# Altium PCB m2m V200.PcbDoc
Units mm, origin at the board's own origin, x right, y up, seen from the top; angles counter-clockwise.
Board outline 110.25 x 67.31 mm, 2 copper layers (Top Layer, Bottom Layer), stack 1.691 mm thick; 176 components, 142 nets, 615 pads, 0 vias.
Unrouted connection lines stored in the file: 387.
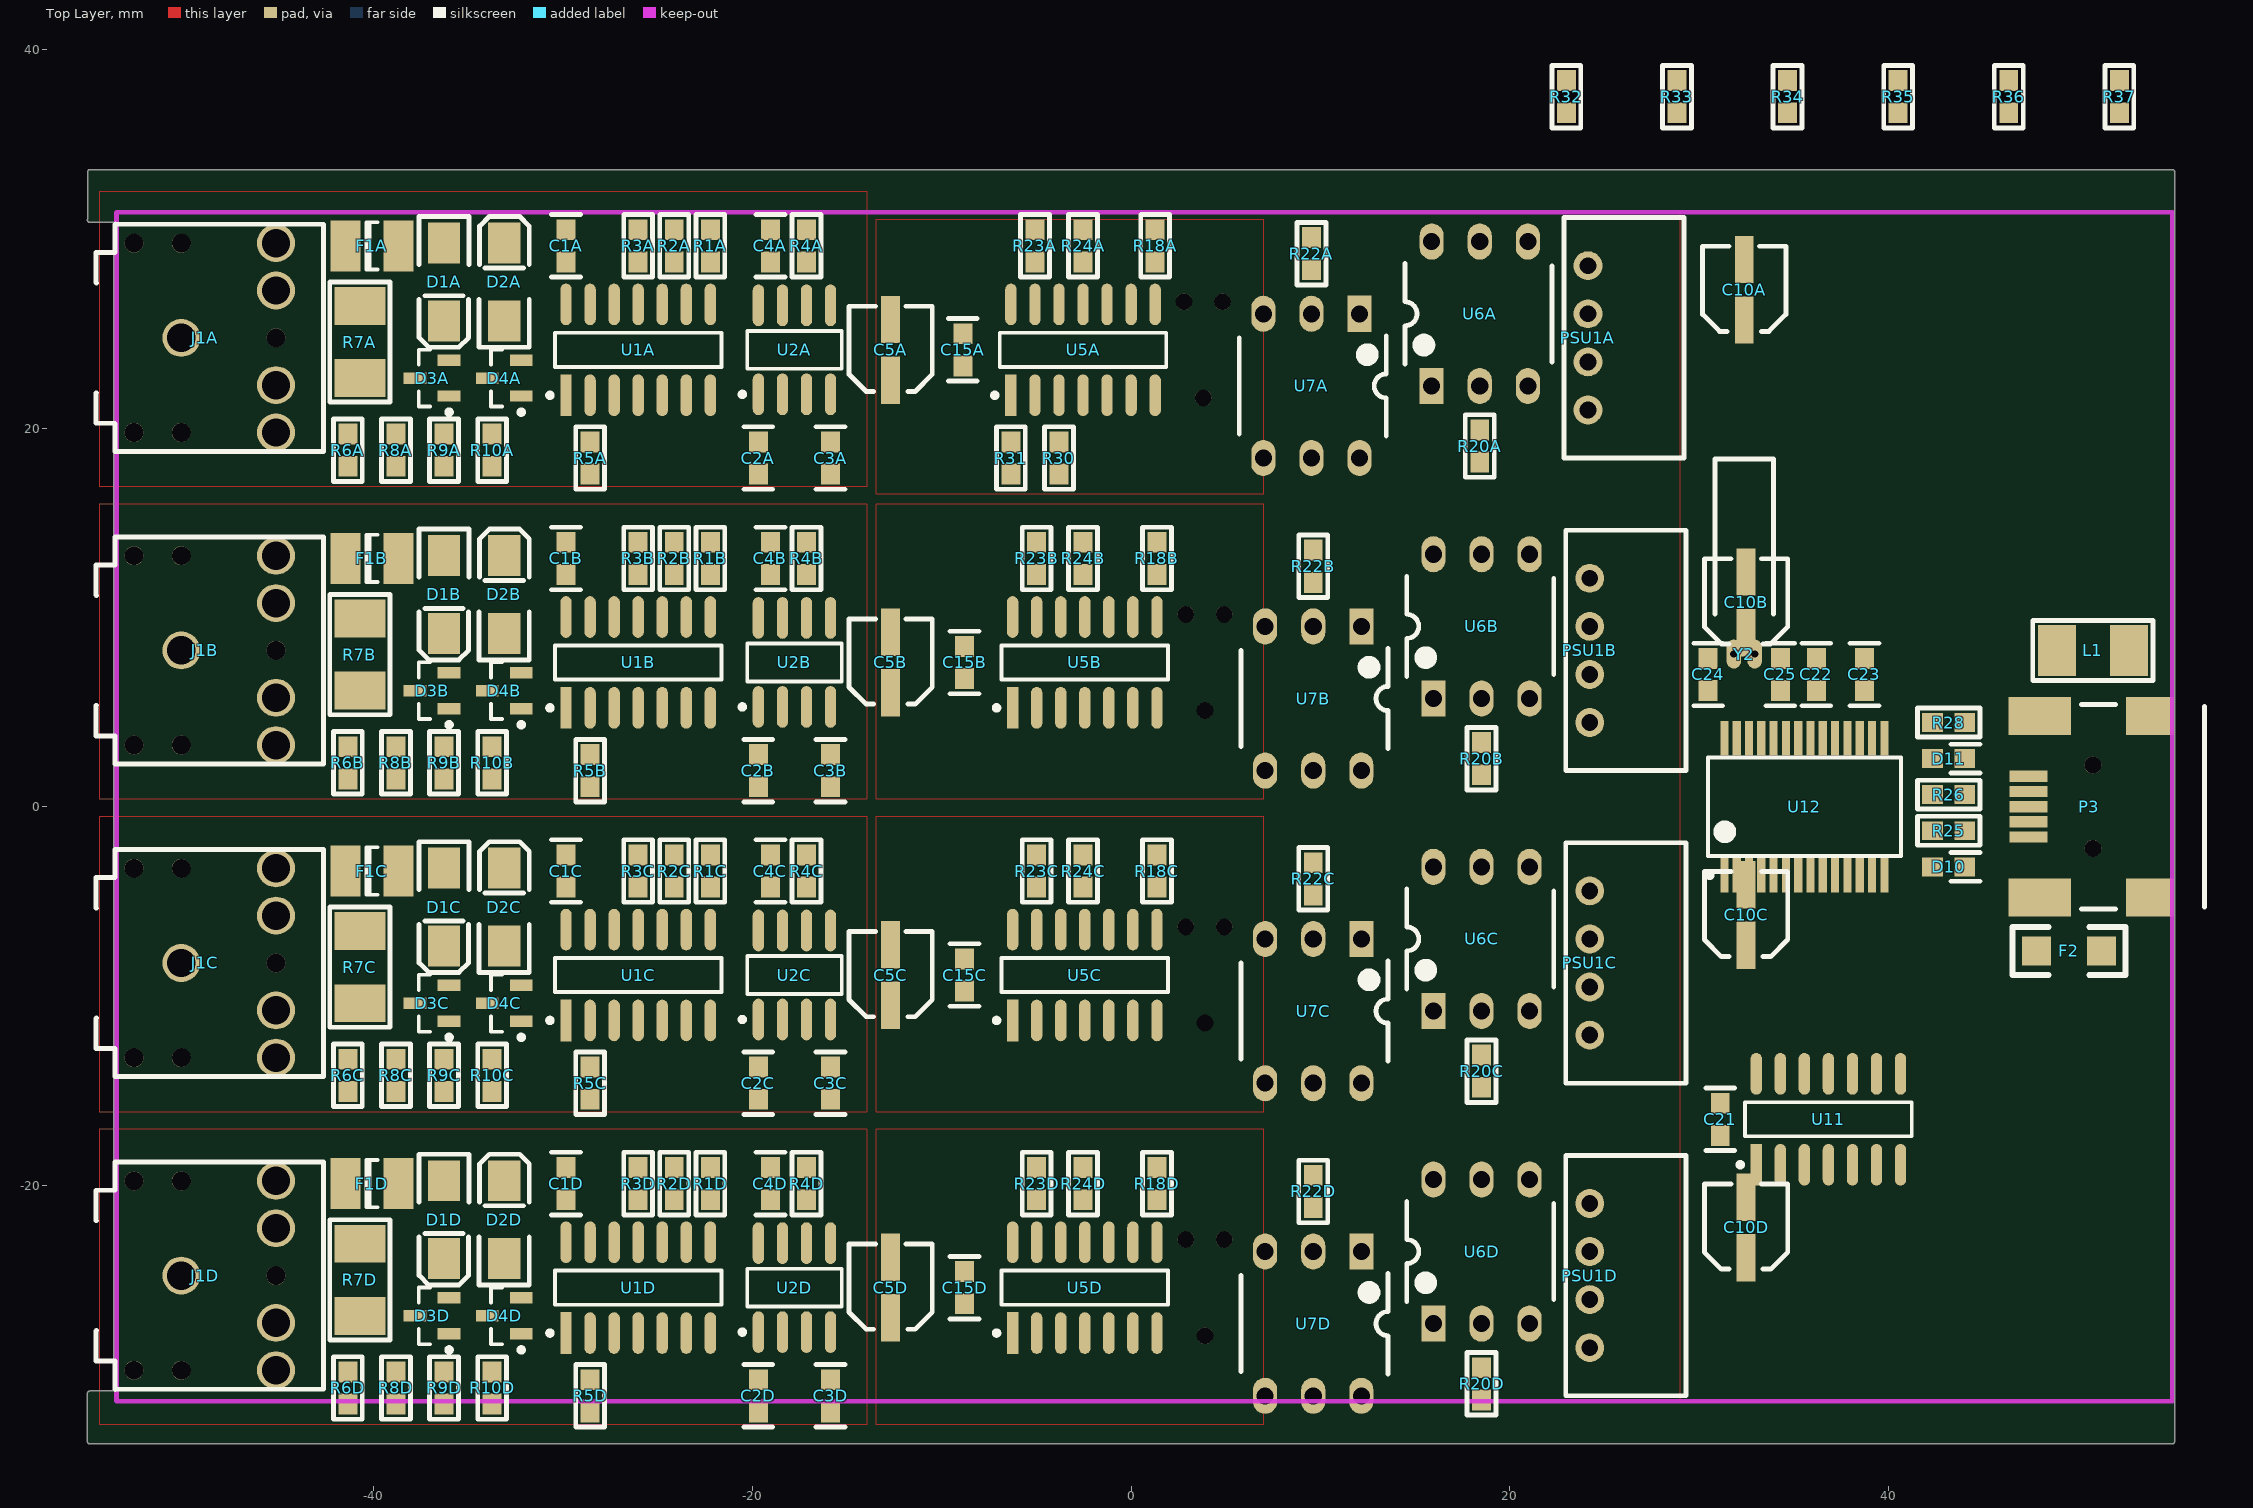
[diagram p0: Top Layer view]
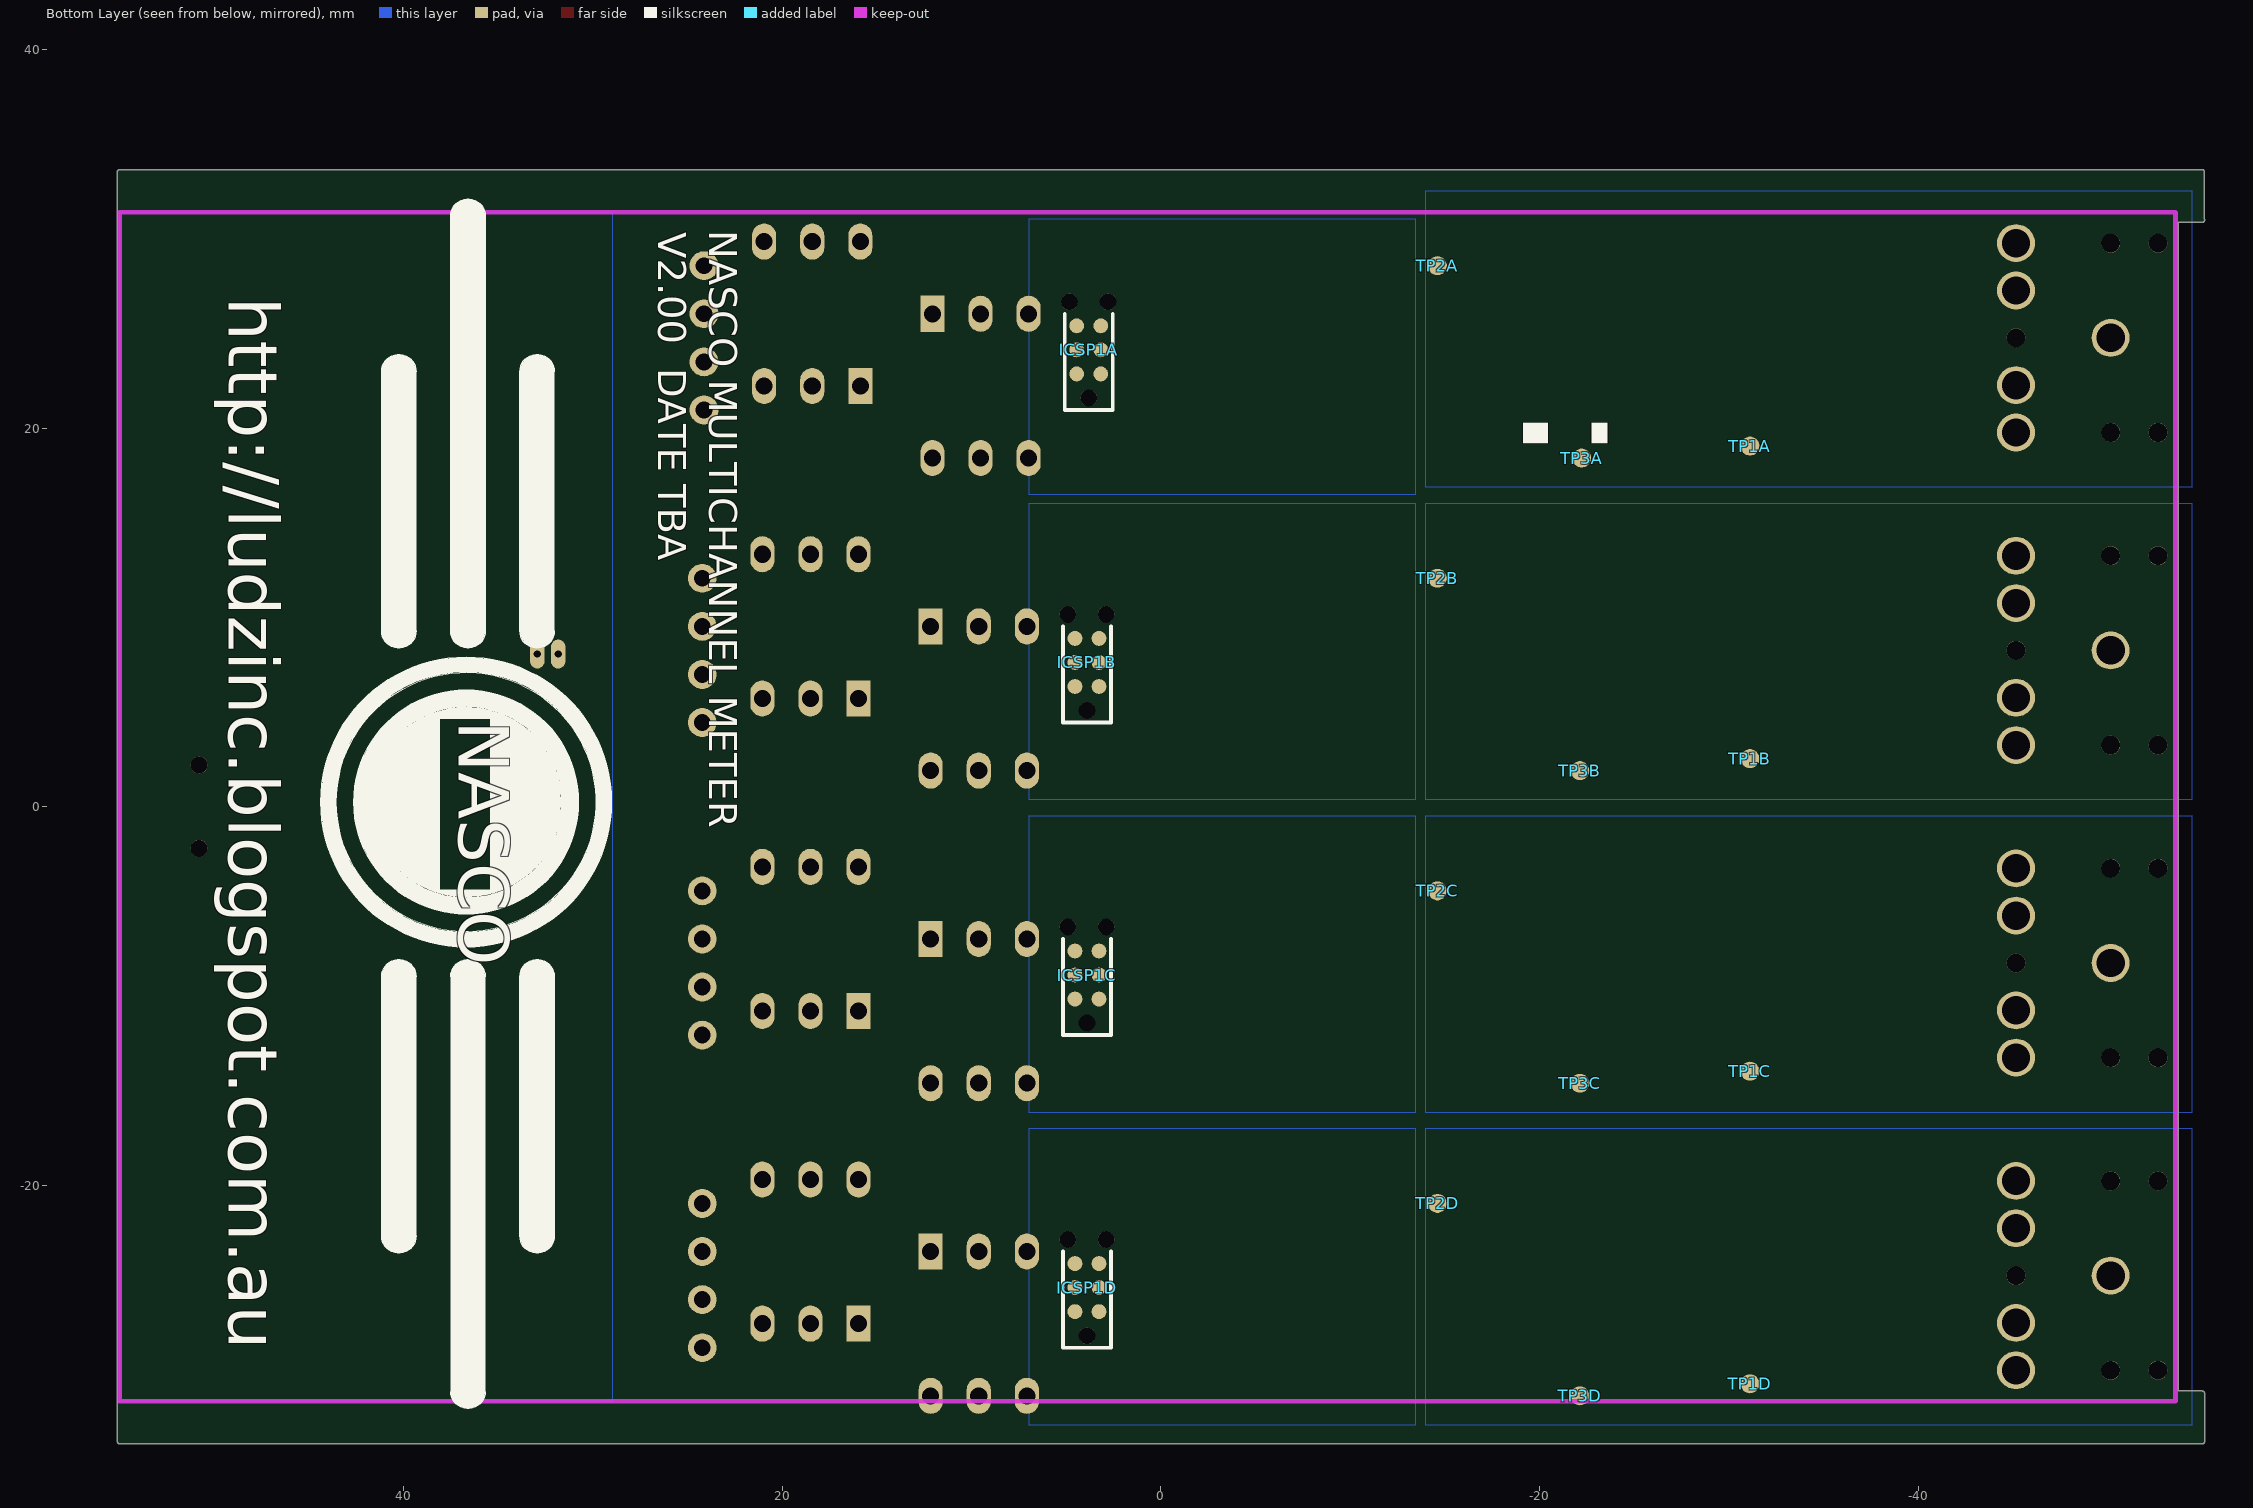
[diagram p1: Bottom Layer view, seen from below]

## Layer stack, top to bottom
Top Layer: signal copper 0.0356
Dielectric: core 1.62, FR-4, Dk 4.8
Bottom Layer: signal copper 0.0356

## Board outline
-55.127,-33.528 -55.127,-30.988 cw(c-55,-30.988) -55,-30.861 -53.721,-30.861 -53.721,30.861 -55,30.861 cw(c-55,30.988) -55.118,31.035 -55.118,33.528 cw(c-54.991,33.528) -54.991,33.655 54.991,33.655 cw(c54.991,33.528) 55.118,33.528 55.118,-33.528 cw(c54.991,-33.528) 54.991,-33.655 -55,-33.655 cw(c-55,-33.528)

## Design rules (kind name [scope] priority, off if disabled: settings)
Clearance Poly_GND [inPolygon vs not innet (gnd)] p1: gap=0.508
Clearance [All] p2: gap=0.203
HoleSize Testpoint [All] p2: absolutevalues=TRUE maxlimit=2.54 minlimit=0.025 maxpercent=80.000 minpercent=20.000
HoleSize TestPointUsage [All] p3: absolutevalues=TRUE maxlimit=2.54 minlimit=0.025 maxpercent=80.000 minpercent=20.000
MinimumSolderMaskSliver SilkscreenOverComponentPads [All] p2: minsoldermaskwidth=0.254
PolygonConnect [All] p1: connectstyle=Relief reliefconductorwidth=0.254 reliefentries=4 polygonreliefangle="90 Angle" airgapwidth=0.254
RoomDefinition Multi2Meter [InComponentClass('Multi2Meter')] p1: confinementstyle=ConfineIn formatcopy=TRUE lockcomponents=FALSE outline 71.159,-10.16 71.159,35.179 64.682,35.179 64.682,-10.16
RoomDefinition "U_USB-UART PL2303(HX)" [InComponentClass('U_USB-UART PL2303(HX)')] p2: confinementstyle=ConfineIn formatcopy=TRUE lockcomponents=FALSE outline 55.245,-33.02 55.245,33.02 25.4,33.02 25.4,-33.02
RoomDefinition U_MICROANDVREF4 [InComponentClass('U_MICROANDVREF4')] p3: confinementstyle=ConfineIn formatcopy=TRUE lockcomponents=FALSE outline -12.7,-33.02 25.494,-33.02 25.494,-16.53 -12.7,-16.53
RoomDefinition U_MICROANDVREF3 [InComponentClass('U_MICROANDVREF3')] p4: confinementstyle=ConfineIn formatcopy=TRUE lockcomponents=FALSE outline -12.7,-16.51 25.494,-16.51 25.494,-0.02 -12.7,-0.02
RoomDefinition U_MICROANDVREF2 [InComponentClass('U_MICROANDVREF2')] p5: confinementstyle=ConfineIn formatcopy=TRUE lockcomponents=FALSE outline -12.7,0 25.494,0 25.494,16.49 -12.7,16.49
RoomDefinition U_MICROANDVREF1 [InComponentClass('U_MICROANDVREF1')] p6: confinementstyle=ConfineIn formatcopy=TRUE lockcomponents=FALSE outline -12.794,16.51 25.4,16.51 25.4,33 -12.794,33
RoomDefinition U_ANALOGCHANNEL4 [InComponentClass('U_ANALOGCHANNEL4')] p7: confinementstyle=ConfineIn formatcopy=TRUE lockcomponents=FALSE outline -54.991,-33.02 3.81,-33.02 3.81,-16.51 -54.991,-16.51
RoomDefinition U_ANALOGCHANNEL3 [InComponentClass('U_ANALOGCHANNEL3')] p8: confinementstyle=ConfineIn formatcopy=TRUE lockcomponents=FALSE outline -54.991,-16.51 3.81,-16.51 3.81,0 -54.991,0
RoomDefinition U_ANALOGCHANNEL2 [InComponentClass('U_ANALOGCHANNEL2')] p9: confinementstyle=ConfineIn formatcopy=TRUE lockcomponents=FALSE outline -54.991,0 3.81,0 3.81,16.51 -54.991,16.51
RoomDefinition U_ANALOGCHANNEL1 [InComponentClass('U_ANALOGCHANNEL1')] p10: confinementstyle=ConfineIn formatcopy=TRUE lockcomponents=FALSE outline -54.991,16.51 3.81,16.51 3.81,33.02 -54.991,33.02
RoutingVias [All] p1: holewidth=0.305 width=0.61 viastyle="Through Hole" minholewidth=0.305 minwidth=0.61 maxholewidth=0.711 maxwidth=1.27
SolderMaskExpansion [All] p1: expansion=0.102
Width Standard [All] p1: maxlimit=0.635 minlimit=0.203 preferedwidth=0.203
Width Power [inNet('VIN')] p2: maxlimit=2.54 minlimit=0.203 preferedwidth=0.635
28 further rules are at their usual default settings.

## Classes and differential pairs
net class ID_[1..2]: ID_1 ID_2
component class Multi2Meter: R30 R31 R32 R33 R34 R35 R36 R37
net class TTL_TX[1..4]: TTL_TX1 TTL_TX2 TTL_TX3 TTL_TX4
net class VPOS[1..4]: VPOS1 VPOS2 VPOS3 VPOS4
net class VNEG[1..4]: VNEG1 VNEG2 VNEG3 VNEG4
net class V_GND[1..4]: V_GND1 V_GND2 V_GND3 V_GND4
net class K_100_[1..4]: K_100_1 K_100_2 K_100_3 K_100_4
net class K_010_[1..4]: K_010_1 K_010_2 K_010_3 K_010_4
net class CHANNEL_SAMPLE[1..4]: CHANNEL_SAMPLE1 CHANNEL_SAMPLE2 CHANNEL_SAMPLE3 CHANNEL_SAMPLE4
channel class "MICRO AND VREF": U_MICROANDVREF1 U_MICROANDVREF2 U_MICROANDVREF3 U_MICROANDVREF4
component class U_MICROANDVREF4: C10D C15D ICSP1D PSU1D R18D R20D R22D R23D TP3D U5D U6D U7D
component class U_MICROANDVREF3: C10C C15C ICSP1C PSU1C R18C R20C R22C R23C TP3C U5C U6C U7C
component class U_MICROANDVREF2: C10B C15B ICSP1B PSU1B R18B R20B R22B R23B TP3B U5B U6B U7B
component class U_MICROANDVREF1: C10A C15A ICSP1A PSU1A R18A R20A R22A R23A TP3A U5A U6A U7A
component class U_ANALOGCHANNEL1: C1A C2A C3A C4A C5A D1A D2A D3A D4A F1A J1A R1A R2A R3A R4A R5A R6A R7A R8A R9A R10A R24A TP1A TP2A U1A U2A
component class U_ANALOGCHANNEL2: C1B C2B C3B C4B C5B D1B D2B D3B D4B F1B J1B R1B R2B R3B R4B R5B R6B R7B R8B R9B R10B R24B TP1B TP2B U1B U2B
component class U_ANALOGCHANNEL3: C1C C2C C3C C4C C5C D1C D2C D3C D4C F1C J1C R1C R2C R3C R4C R5C R6C R7C R8C R9C R10C R24C TP1C TP2C U1C U2C
component class U_ANALOGCHANNEL4: C1D C2D C3D C4D C5D D1D D2D D3D D4D F1D J1D R1D R2D R3D R4D R5D R6D R7D R8D R9D R10D R24D TP1D TP2D U1D U2D
channel class "ANALOG CHANNEL": U_ANALOGCHANNEL1 U_ANALOGCHANNEL2 U_ANALOGCHANNEL3 U_ANALOGCHANNEL4
component class "U_USB-UART PL2303(HX)": C21 C22 C23 C24 C25 D10 D11 F2 L1 P3 R25 R26 R28 U11 U12 Y2

## Components (designator, comment, footprint, x,y, rotation, side; value= is the part's Value field where it differs from the comment)
C1A "100nF" "CAP (3D) - 0603" -29.845,29.624 r90 top (schematic designator C1)
C1B "100nF" "CAP (3D) - 0603" -29.845,13.114 r90 top (schematic designator C1)
C1C "100nF" "CAP (3D) - 0603" -29.845,-3.396 r90 top (schematic designator C1)
C1D "100nF" "CAP (3D) - 0603" -29.845,-19.906 r90 top (schematic designator C1)
C2A "100nF" "CAP (3D) - 0603" -19.685,18.415 r270 top (schematic designator C2)
C2B "100nF" "CAP (3D) - 0603" -19.685,1.905 r270 top (schematic designator C2)
C2C "100nF" "CAP (3D) - 0603" -19.685,-14.605 r270 top (schematic designator C2)
C2D "100nF" "CAP (3D) - 0603" -19.685,-31.115 r270 top (schematic designator C2)
C3A "100nF" "CAP (3D) - 0603" -15.875,18.415 r90 top (schematic designator C3)
C3B "100nF" "CAP (3D) - 0603" -15.875,1.905 r90 top (schematic designator C3)
C3C "100nF" "CAP (3D) - 0603" -15.875,-14.605 r90 top (schematic designator C3)
C3D "100nF" "CAP (3D) - 0603" -15.875,-31.115 r90 top (schematic designator C3)
C4A "1nF" "CAP (3D) - 0603" -19.05,29.624 r90 top (schematic designator C4)
C4B "1nF" "CAP (3D) - 0603" -19.05,13.114 r90 top (schematic designator C4)
C4C "1nF" "CAP (3D) - 0603" -19.05,-3.396 r90 top (schematic designator C4)
C4D "1nF" "CAP (3D) - 0603" -19.05,-19.906 r90 top (schematic designator C4)
C5A "10uF" "CAP ELECTRO SIZE-B" -12.7,24.13 r0 top (schematic designator C5)
C5B "10uF" "CAP ELECTRO SIZE-B" -12.7,7.62 r0 top (schematic designator C5)
C5C "10uF" "CAP ELECTRO SIZE-B" -12.7,-8.89 r0 top (schematic designator C5)
C5D "10uF" "CAP ELECTRO SIZE-B" -12.7,-25.4 r0 top (schematic designator C5)
C10A "10uF" "CAP ELECTRO SIZE-B" 32.385,27.305 r0 top (schematic designator C10)
C10B "10uF" "CAP ELECTRO SIZE-B" 32.479,10.795 r0 top (schematic designator C10)
C10C "10uF" "CAP ELECTRO SIZE-B" 32.479,-5.715 r0 top (schematic designator C10)
C10D "10uF" "CAP ELECTRO SIZE-B" 32.479,-22.225 r0 top (schematic designator C10)
C15A "100nF" "CAP (3D) - 0603" -8.89,24.13 r90 top (schematic designator C15)
C15B "100nF" "CAP (3D) - 0603" -8.796,7.62 r90 top (schematic designator C15)
C15C "100nF" "CAP (3D) - 0603" -8.796,-8.89 r90 top (schematic designator C15)
C15D "100nF" "CAP (3D) - 0603" -8.796,-25.4 r90 top (schematic designator C15)
C21 "100nF" "CAP (3D) - 0603" 31.115,-16.51 r90 top
C22 "100nF" "CAP (3D) - 0603" 36.195,6.985 r270 top
C23 "100nF" "CAP (3D) - 0603" 38.735,6.985 r270 top
C24 "22pF" "CAP (3D) - 0603" 30.48,6.985 r90 top
C25 "22pF" "CAP (3D) - 0603" 34.29,6.985 r90 top
D1A "S1M" DO-214AC -36.289,27.719 r270 top (schematic designator D1)
D1B "S1M" DO-214AC -36.289,11.209 r270 top (schematic designator D1)
D1C "S1M" DO-214AC -36.289,-5.301 r270 top (schematic designator D1)
D1D "S1M" DO-214AC -36.289,-21.811 r270 top (schematic designator D1)
D2A "S1M" DO-214AC -33.114,27.719 r90 top (schematic designator D2)
D2B "S1M" DO-214AC -33.114,11.209 r90 top (schematic designator D2)
D2C "S1M" DO-214AC -33.114,-5.301 r90 top (schematic designator D2)
D2D "S1M" DO-214AC -33.114,-21.811 r90 top (schematic designator D2)
D3A "5V1" SOT23-3L -36.924,22.639 r180 top (schematic designator D3)
D3B "5V1" SOT23-3L -36.924,6.129 r180 top (schematic designator D3)
D3C "5V1" SOT23-3L -36.924,-10.381 r180 top (schematic designator D3)
D3D "5V1" SOT23-3L -36.924,-26.891 r180 top (schematic designator D3)
D4A "5V1" SOT23-3L -33.114,22.639 r180 top (schematic designator D4)
D4B "5V1" SOT23-3L -33.114,6.129 r180 top (schematic designator D4)
D4C "5V1" SOT23-3L -33.114,-10.381 r180 top (schematic designator D4)
D4D "5V1" SOT23-3L -33.114,-26.891 r180 top (schematic designator D4)
D10 "TVS" "TVS (3D) - 0603" 43.18,-3.175 r180 top
D11 "TVS" "TVS (3D) - 0603" 43.18,2.54 r180 top
F1A "1.1A" "LITTELFUSE 1210" -40.099,29.624 r0 top (schematic designator F1)
F1B "1.1A" "LITTELFUSE 1210" -40.099,13.114 r0 top (schematic designator F1)
F1C "1.1A" "LITTELFUSE 1210" -40.099,-3.396 r0 top (schematic designator F1)
F1D "1.1A" "LITTELFUSE 1210" -40.099,-19.906 r0 top (schematic designator F1)
F2 "160mA" 1206 49.53,-7.62 r180 top
ICSP1A "TAG CONNECT" "ICSP - TAG CONNECT TYPE2" 3.81,21.59 r270 bottom (schematic designator ICSP1)
ICSP1B "TAG CONNECT" "ICSP - TAG CONNECT TYPE2" 3.904,5.08 r270 bottom (schematic designator ICSP1)
ICSP1C "TAG CONNECT" "ICSP - TAG CONNECT TYPE2" 3.904,-11.43 r270 bottom (schematic designator ICSP1)
ICSP1D "TAG CONNECT" "ICSP - TAG CONNECT TYPE2" 3.904,-27.94 r270 bottom (schematic designator ICSP1)
J1A "3.5mm Stereo" "3.5MM pcb mouNt" -50.165,24.765 r0 top (schematic designator J1)
J1B "3.5mm Stereo" "3.5MM pcb mouNt" -50.165,8.255 r0 top (schematic designator J1)
J1C "3.5mm Stereo" "3.5MM pcb mouNt" -50.165,-8.255 r0 top (schematic designator J1)
J1D "3.5mm Stereo" "3.5MM pcb mouNt" -50.165,-24.765 r0 top locked (schematic designator J1)
L1 "BEAD" "RES (3D) - 1210" 50.8,8.255 r180 top
P3 "MINI USB" "MINI USB" 50.8,0 r90 top
PSU1A "IE0505S" IE0505S 24.13,24.765 r90 top (schematic designator PSU1)
PSU1B "IE0505S" IE0505S 24.224,8.255 r90 top (schematic designator PSU1)
PSU1C "IE0505S" IE0505S 24.224,-8.255 r90 top (schematic designator PSU1)
PSU1D "IE0505S" IE0505S 24.224,-24.765 r90 top (schematic designator PSU1)
R1A "99k" "RES (3D) - 0603" -22.225,29.624 r270 top (schematic designator R1)
R1B "99k" "RES (3D) - 0603" -22.225,13.114 r270 top (schematic designator R1)
R1C "99k" "RES (3D) - 0603" -22.225,-3.396 r270 top (schematic designator R1)
R1D "99k" "RES (3D) - 0603" -22.225,-19.906 r270 top (schematic designator R1)
R2A "11k" "RES (3D) - 0603" -24.13,29.624 r270 top (schematic designator R2)
R2B "11k" "RES (3D) - 0603" -24.13,13.114 r270 top (schematic designator R2)
R2C "11k" "RES (3D) - 0603" -24.13,-3.396 r270 top (schematic designator R2)
R2D "11k" "RES (3D) - 0603" -24.13,-19.906 r270 top (schematic designator R2)
R3A "1k" "RES (3D) - 0603" -26.035,29.624 r270 top (schematic designator R3)
R3B "1k" "RES (3D) - 0603" -26.035,13.114 r270 top (schematic designator R3)
R3C "1k" "RES (3D) - 0603" -26.035,-3.396 r270 top (schematic designator R3)
R3D "1k" "RES (3D) - 0603" -26.035,-19.906 r270 top (schematic designator R3)
R4A "99k" "RES (3D) - 0603" -17.145,29.624 r90 top (schematic designator R4)
R4B "99k" "RES (3D) - 0603" -17.145,13.114 r90 top (schematic designator R4)
R4C "99k" "RES (3D) - 0603" -17.145,-3.396 r90 top (schematic designator R4)
R4D "99k" "RES (3D) - 0603" -17.145,-19.906 r90 top (schematic designator R4)
R5A "100R" "RES (3D) - 0603" -28.575,18.415 r90 top (schematic designator R5)
R5B "100R" "RES (3D) - 0603" -28.575,1.905 r90 top (schematic designator R5)
R5C "100R" "RES (3D) - 0603" -28.575,-14.605 r90 top (schematic designator R5)
R5D "100R" "RES (3D) - 0603" -28.575,-31.115 r90 top (schematic designator R5)
R6A "9M1" "RES (3D) - 0603" -41.369,18.829 r90 top (schematic designator R6)
R6B "9M1" "RES (3D) - 0603" -41.369,2.319 r90 top (schematic designator R6)
R6C "9M1" "RES (3D) - 0603" -41.369,-14.191 r90 top (schematic designator R6)
R6D "9M1" "RES (3D) - 0603" -41.369,-30.701 r90 top (schematic designator R6)
R7A "SHUNT" "RES (3D) - 1210" -40.734,24.544 r90 top (schematic designator R7)
R7B "SHUNT" "RES (3D) - 1210" -40.734,8.034 r90 top (schematic designator R7)
R7C "SHUNT" "RES (3D) - 1210" -40.734,-8.476 r90 top (schematic designator R7)
R7D "SHUNT" "RES (3D) - 1210" -40.734,-24.986 r90 top (schematic designator R7)
R8A "330K" "RES (3D) - 0603" -38.829,18.829 r270 top (schematic designator R8)
R8B "330K" "RES (3D) - 0603" -38.829,2.319 r270 top (schematic designator R8)
R8C "330K" "RES (3D) - 0603" -38.829,-14.191 r270 top (schematic designator R8)
R8D "330K" "RES (3D) - 0603" -38.829,-30.701 r270 top (schematic designator R8)
R9A "470K" "RES (3D) - 0603" -36.289,18.829 r90 top (schematic designator R9)
R9B "470K" "RES (3D) - 0603" -36.289,2.319 r90 top (schematic designator R9)
R9C "470K" "RES (3D) - 0603" -36.289,-14.191 r90 top (schematic designator R9)
R9D "470K" "RES (3D) - 0603" -36.289,-30.701 r90 top (schematic designator R9)
R10A "100K" "RES (3D) - 0603" -33.749,18.829 r270 top (schematic designator R10)
R10B "100K" "RES (3D) - 0603" -33.749,2.319 r270 top (schematic designator R10)
R10C "100K" "RES (3D) - 0603" -33.749,-14.191 r270 top (schematic designator R10)
R10D "100K" "RES (3D) - 0603" -33.749,-30.701 r270 top (schematic designator R10)
R18A "100R" "RES (3D) - 0603" 1.27,29.624 r270 top (schematic designator R18)
R18B "100R" "RES (3D) - 0603" 1.364,13.114 r270 top (schematic designator R18)
R18C "100R" "RES (3D) - 0603" 1.364,-3.396 r270 top (schematic designator R18)
R18D "100R" "RES (3D) - 0603" 1.364,-19.906 r270 top (schematic designator R18)
R20A "470R" "RES (3D) - 0603" 18.415,19.05 r270 top (schematic designator R20)
R20B "470R" "RES (3D) - 0603" 18.509,2.54 r270 top (schematic designator R20)
R20C "470R" "RES (3D) - 0603" 18.509,-13.97 r270 top (schematic designator R20)
R20D "470R" "RES (3D) - 0603" 18.509,-30.48 r270 top (schematic designator R20)
R22A "470R" "RES (3D) - 0603" 9.525,29.21 r90 top (schematic designator R22)
R22B "470R" "RES (3D) - 0603" 9.619,12.7 r90 top (schematic designator R22)
R22C "470R" "RES (3D) - 0603" 9.619,-3.81 r90 top (schematic designator R22)
R22D "470R" "RES (3D) - 0603" 9.619,-20.32 r90 top (schematic designator R22)
R23A "1k" "RES (3D) - 0603" -5.08,29.624 r270 top (schematic designator R23)
R23B "1k" "RES (3D) - 0603" -4.986,13.114 r270 top (schematic designator R23)
R23C "1k" "RES (3D) - 0603" -4.986,-3.396 r270 top (schematic designator R23)
R23D "1k" "RES (3D) - 0603" -4.986,-19.906 r270 top (schematic designator R23)
R24A "100R" "RES (3D) - 0603" -2.54,29.624 r90 top (schematic designator R24)
R24B "100R" "RES (3D) - 0603" -2.54,13.114 r90 top (schematic designator R24)
R24C "100R" "RES (3D) - 0603" -2.54,-3.396 r90 top (schematic designator R24)
R24D "100R" "RES (3D) - 0603" -2.54,-19.906 r90 top (schematic designator R24)
R25 "22R" "RES (3D) - 0603" 43.18,-1.27 r0 top
R26 "22R" "RES (3D) - 0603" 43.18,0.635 r0 top
R28 "1k5" "RES (3D) - 0603" 43.18,4.445 r180 top
R30 "1k" "RES (3D) - 0603" -3.81,18.415 r90 top
R31 "1k" "RES (3D) - 0603" -6.35,18.415 r90 top
R32 "1k" "RES (3D) - 0603" 22.987,37.504 r270 top
R33 "1k" "RES (3D) - 0603" 28.829,37.504 r270 top
R34 "1k" "RES (3D) - 0603" 34.671,37.504 r270 top
R35 "1k" "RES (3D) - 0603" 40.513,37.504 r270 top
R36 "1k" "RES (3D) - 0603" 46.355,37.504 r270 top
R37 "1k" "RES (3D) - 0603" 52.197,37.504 r270 top
TP1A "TestPoint" TP -31.115,19.05 r90 bottom (schematic designator TP1)
TP1B "TestPoint" TP -31.115,2.54 r90 bottom (schematic designator TP1)
TP1C "TestPoint" TP -31.115,-13.97 r90 bottom (schematic designator TP1)
TP1D "TestPoint" TP -31.115,-30.48 r90 bottom (schematic designator TP1)
TP2A "TestPoint" TP -14.605,28.575 r90 bottom (schematic designator TP2)
TP2B "TestPoint" TP -14.605,12.065 r90 bottom (schematic designator TP2)
TP2C "TestPoint" TP -14.605,-4.445 r90 bottom (schematic designator TP2)
TP2D "TestPoint" TP -14.605,-20.955 r90 bottom (schematic designator TP2)
TP3A "TestPoint" TP -22.225,18.415 r90 bottom (schematic designator TP3)
TP3B "TestPoint" TP -22.131,1.905 r90 bottom (schematic designator TP3)
TP3C "TestPoint" TP -22.131,-14.605 r90 bottom (schematic designator TP3)
TP3D "TestPoint" TP -22.131,-31.115 r90 bottom (schematic designator TP3)
U1A "74HC4066" D014_N -26.035,24.13 r0 top (schematic designator U1)
U1B "74HC4066" D014_N -26.035,7.62 r0 top (schematic designator U1)
U1C "74HC4066" D014_N -26.035,-8.89 r0 top (schematic designator U1)
U1D "74HC4066" D014_N -26.035,-25.4 r0 top (schematic designator U1)
U2A "MAX4238ASA+" SO-8 -17.78,24.13 r90 top (schematic designator U2)
U2B "MAX4238ASA+" SO-8 -17.78,7.62 r90 top (schematic designator U2)
U2C "MAX4238ASA+" SO-8 -17.78,-8.89 r90 top (schematic designator U2)
U2D "MAX4238ASA+" SO-8 -17.78,-25.4 r90 top (schematic designator U2)
U5A "PIC16F1704" SOIC-14 -2.54,24.13 r0 top (schematic designator U5)
U5B "PIC16F1704" SOIC-14 -2.446,7.62 r0 top (schematic designator U5)
U5C "PIC16F1704" SOIC-14 -2.446,-8.89 r0 top (schematic designator U5)
U5D "PIC16F1704" SOIC-14 -2.446,-25.4 r0 top (schematic designator U5)
U6A "OPTO H11L1M" DIP_6 18.415,26.035 r90 top (schematic designator U6)
U6B "OPTO H11L1M" DIP_6 18.509,9.525 r90 top (schematic designator U6)
U6C "OPTO H11L1M" DIP_6 18.509,-6.985 r90 top (schematic designator U6)
U6D "OPTO H11L1M" DIP_6 18.509,-23.495 r90 top (schematic designator U6)
U7A "OPTO H11L1M" DIP_6 9.525,22.225 r270 top (schematic designator U7)
U7B "OPTO H11L1M" DIP_6 9.619,5.715 r270 top (schematic designator U7)
U7C "OPTO H11L1M" DIP_6 9.619,-10.795 r270 top (schematic designator U7)
U7D "OPTO H11L1M" DIP_6 9.619,-27.305 r270 top (schematic designator U7)
U11 "SN74AHC04D" SOIC-14 36.83,-16.51 r0 top
U12 "PL2303" SSOP28 35.56,0 r0 top
Y2 "XTAL" "CRYSTAL 3x8" 32.385,10.16 r90 top

## Footprints (in the part's own frame and the unit in brackets; to place one, negate y for a bottom-side part, rotate by r counter-clockwise, add the part's x,y. Pads: shape width x height; smd on the part's side, far side on the other; paste and mask are expansions set on the pad)
"3.5MM pcb mouNt" [mm]
  round 1 hole 1: 0(-2.5,-5) 0(-2.5,5) 0(0,-5) 0(0,5) 0(5,0)
  round 2 hole 1.5: 1(0,0) 2(5,-5) 3(5,-2.5) 4(5,2.5) 5(5,5)
  silkscreen extent -4.5,-6.01 7.5,6.01, body extent -6.55,-6 7.5,6, height 5.52
1206 [mil]
  rect 60x60 smd: 1(-67.5,0) 2(67.5,0)
  silkscreen extent -118,-50 118,50, body extent -63,-31 63,31, height 22
"CAP (3D) - 0603" [mm]
  rect 1.1x1 smd: 1(0.85,0) 2(-0.85,0)
  silkscreen extent -1.65,-0.76 1.65,0.76, body extent -0.8,-0.4 0.8,0.4, height 0.92
"CAP ELECTRO SIZE-B" [mm]
  rect 1x2.5 smd: 1(0,-1.6) 2(0,1.6)
  silkscreen extent -2.2,-2.2 2.2,2.3, body extent -2.15,-2.3 2.15,2.3, height 5.4
"CRYSTAL 3x8" [mil]
  oval 60x30 hole 15: 1(-82.68,-21.65) 2(-82.68,21.65)
  silkscreen extent 0,-61 323,61, body extent -323,-61 116,61, height 120
D014_N [mm] "SOIC, 14-Leads, Body 8.7x3.9mm, Pitch 1.27mm, IPC Medium Density"
  rect 0.6x2.2 smd: 1(-3.81,-2.4)
  oval 0.6x2.2 smd: 2(-2.54,-2.4) 3(-1.27,-2.4) 4(0,-2.4) 5(1.27,-2.4) 6(2.54,-2.4) 7(3.81,-2.4) 8(3.81,2.4) 9(2.54,2.4) 10(1.27,2.4) 11(0,2.4) 12(-1.27,2.4) 13(-2.54,2.4) 14(-3.81,2.4)
  silkscreen extent -4.78,-2.52 4.4,0.9, body extent -4.37,-3 4.38,3, height 1.75
DIP_6 [mm]
  rect 1.905x1.27 hole 0.9: 1(-3.81,2.54)
  oval 1.905x1.27 hole 0.9: 2(-3.81,0) 3(-3.81,-2.54) 4(3.81,-2.54) 5(3.81,0) 6(3.81,2.54)
  silkscreen extent -2.65,-3.81 2.65,3.95, body extent -4,-4.02 4,4.06, height 4.32
DO-214AC [mil]
  rect 85x67 smd: 1(-81,0) 2(81,0)
  silkscreen extent -136,-52 136,52, body extent -79,-39 79,39, height 61
"ICSP - TAG CONNECT TYPE2" [mil] "ICSP - TAG CONNECT - TYPE 2"
  round 31 smd paste-40: 1(-50,25) 2(-50,-25) 3(-100,25) 4(-100,-25) 5(-150,25) 6(-150,-25)
  round 34 hole 35 unplated: A(0,0) B(-200,-40) C(-200,40)
  silkscreen extent -175,-50 25,50
IE0505S [mil]
  round 60 hole 35: 1(150,0) 2(50,0) 3(-50,0) 4(-150,0)
  silkscreen extent -250,-200 250,50, body extent -228,-200 228,36, height 394
"LITTELFUSE 1210" [mm] "Chip Capacitor; Body 3.2 x 2.5 mm (LxW typ)"
  rect 1.6x2.7 smd: 1(-1.4,0) 2(1.4,0)
  silkscreen extent -0.3,-1.25 0.3,1.25, body extent -1.61,-1.29 1.61,1.29, height 0.67
"MINI USB" [mm] "KEYSTONE ELECTRONICS 934"
  rect 2x2.5 smd: 0(-4.8,-3) 0(4.8,-3)
  rect 2x3.3 smd: 0(-4.8,2.8) 0(4.8,2.8)
  rect 0.6x2 smd: 1(-1.6,3.4) 2(-0.8,3.4) 3(0,3.4) 4(0.8,3.4) 5(1.6,3.4)
  round 0.89 hole 0.89 unplated: MT(-2.2,0) MT(2.2,0)
  silkscreen extent -5.4,-5.9 5.4,0.6, body extent -5.35,-5.9 5.35,3.3, height 3.97
"RES (3D) - 0603" [mm]
  rect 1.1x1 smd: 1(0.85,0) 2(-0.85,0)
  silkscreen extent -1.65,-0.76 1.65,0.76, body extent -0.8,-0.4 0.8,0.4, height 0.92
"RES (3D) - 1210" [mm] "Chip Diode; Body 3.2 x 2.5 mm (LxW typ)"
  rect 2x2.7 smd: 1(-1.905,0) 2(1.905,0)
  silkscreen extent -3.18,-1.59 3.18,1.59, body extent -2,-1.24 2,1.24, height 1.7
SO-8 [mm] "SOIC, 8-Leads, Body 4.9x3.9mm, Pitch 1.27mm, IPC High Density"
  oval 2.2x0.6 smd: 1(-2.35,1.905) 2(-2.35,0.635) 3(-2.35,-0.635) 4(-2.35,-1.905) 5(2.35,-1.905) 6(2.35,-0.635) 7(2.35,0.635) 8(2.35,1.905)
  silkscreen extent -2.47,-2.5 1,2.88, body extent -2.9,-2.45 3.1,2.45, height 1.75
SOIC-14 [mm] "SOIC-14  NARROW BODY"
  rect 0.6x2.2 smd: 1(-3.81,-2.4)
  oval 0.6x2.2 smd: 2(-2.54,-2.4) 3(-1.27,-2.4) 4(0,-2.4) 5(1.27,-2.4) 6(2.54,-2.4) 7(3.81,-2.4) 8(3.81,2.4) 9(2.54,2.4) 10(1.27,2.4) 11(0,2.4) 12(-1.27,2.4) 13(-2.54,2.4) 14(-3.81,2.4)
  silkscreen extent -4.78,-2.52 4.4,0.9, body extent -4.37,-3 4.38,3, height 1.75
SOT23-3L [mm] "SOT23, 3-Leads, Body 2.9x1.3mm, Pitch 0.95mm, Lead Span 2.5mm, IPC High Density"
  rect 1.2x0.6 smd: 1(-0.9,0.95) 2(-0.9,-0.95) 3(0.9,0)
  silkscreen extent -1.02,-1.5 0.7,1.92, body extent -1.25,-1.5 1.25,1.5, height 1.12
SSOP28 [mil]
  rect 17x72 smd: 1(-166.34,-142.72) 2(-140.75,-142.72) 3(-115.16,-142.72) 4(-89.57,-142.72) 5(-63.98,-142.72) 6(-38.39,-142.72) 7(-12.8,-142.72) 8(12.8,-142.72) 9(38.38,-142.72) 10(63.97,-142.72) 11(89.56,-142.72) 12(115.15,-142.72) 13(140.74,-142.72) 14(166.33,-142.72) 15(166.33,142.72) 16(140.74,142.72) 17(115.15,142.72) 18(89.56,142.72) 19(63.97,142.72) 20(38.38,142.72) 21(12.8,142.72) 22(-12.8,142.72) 23(-38.39,142.72) 24(-63.98,142.72) 25(-89.57,142.72) 26(-115.16,142.72) 27(-140.75,142.72) 28(-166.34,142.72)
  silkscreen extent -205,-148 201,102, body extent -203,-153 203,153, height 85
TP [mm] "Test Point, Single Side, No Hole"
  round 1 smd: 1(0,0)
"TVS (3D) - 0603" [mm]
  rect 1.1x1 smd: 1(0.85,0) 2(-0.85,0)
  silkscreen extent -1.65,-0.76 -0.13,0.76, body extent -0.8,-0.4 0.8,0.4, height 0.72

## Part data
C1A C1B C1C C1D C2A C2B C2C C2D C3A C3B C3C C3D C4A C4B C4C C4D C15A C15B C15C C15D C21: library part Cap, "Capacitor"
C5A C5B C5C C5D C10A C10B C10C C10D: library part "Cap Pol1", "Polarized Capacitor (Radial)"
C22 C23: library part "CAP SMD 0603 100nF", "CAPACITOR SMD 0603"
C24 C25: library part "CAP SMD 0603 1nF", "CAPACITOR SMD 0603"
D1A D1B D1C D1D D2A D2B D2C D2D: library part DIODE, "DIODE, POWER"
D3A D3B D3C D3D D4A D4B D4C D4D: library part "D Zener", "Zener Diode"
D10 D11: library part "TVS DIODE", "Transient Voltage Suppression (TVS) Diode"
F1A F1B F1C F1D F2: library part "Fuse 2", "Fuse"
ICSP1A ICSP1B ICSP1C ICSP1D: library part "ICSP - TAG CONNECT"
J1A J1B J1C J1D: library part "Phonejack Stereo SW", "3-Conductor Jack with 2 break contacts (normals) and 2 auxiliary make contacts"
L1: library part "INDUCTOR SMD 1210 100uH", "INDUCTOR SMD 1210"
P3: library part "MICRO USB", "MICRO USB"
PSU1A PSU1B PSU1C PSU1D: library part "5V ISOLATED", "XP POWER IE0505S"
R1A R1B R1C R1D R2A R2B R2C R2D R3A R3B R3C R3D R4A R4B R4C R4D R5A R5B R5C R5D R18A R18B R18C R18D R23A R23B R23C R23D R24A R24B R24C R24D R30 R31 R32 R33 R34 R35 R36 R37: library part "RES SMD 0603", "RESISTOR SMD 0603"
R6A R6B R6C R6D R8A R8B R8C R8D R9A R9B R9C R9D R10A R10B R10C R10D: library part "RES SMD 0603 10k", "RESISTOR SMD 0603 10k"
R7A R7B R7C R7D: library part Res2, "Resistor"
R20A R20B R20C R20D R22A R22B R22C R22D: library part "RES SMD 0603 1k", "RESISTOR SMD 0603 1k"
R25 R26 R28: library part "RES SMD 0603 0R", "RESISTOR SMD 0603 0R"
U1A U1B U1C U1D: "Quadruple Bilateral Analog Switch"
U2A U2B U2C U2D: library part MAX495CSA, "Single Voltage-Feedback Operational Amplifier"
U6A U6B U6C U6D U7A U7B U7C U7D: library part H11L1M, "6-Pin Logic Output Optocoupler"
U11: "Hex Inverter"
U12: "PL2303 USB to 232 Converter (FT232 Compatible)"
Y2: "Crystal Oscillator"

## Nets (pads, with @x,y where several pads share a name; then routed paths per layer and width w, separated by ;. In a path a pad name is that pad's centre, name@x,y a point inside that pad or via, vN(x,y) a via of type N, cw(c..) or ccw(c..) an arc to the next point about the centre after c; other vN are vias at no path point)
3V3: C23.1 R28.1 U12.4 U12.17 U12.19
AMPS_IN_1A: F1A.1 J1A.5
AMPS_IN_1B: F1B.1 J1B.5
AMPS_IN_1C: F1C.1 J1C.5
AMPS_IN_1D: F1D.1 J1D.5
CHANNEL_SAMPLE1: R24A.2 U5A.11
CHANNEL_SAMPLE2: R24B.2 U5B.11
CHANNEL_SAMPLE3: R24C.2 U5C.11
CHANNEL_SAMPLE4: R24D.2 U5D.11
GND: C10A.2 C10B.2 C10C.2 C10D.2 C21.1 C22.2 C23.2 C24.2 C25.2 D10.1 D11.1 L1.2 P3.5 PSU1A.1 PSU1B.1 PSU1C.1 PSU1D.1 U7A.5 U7B.5 U7C.5 U7D.5 U11.7 U11.13 U12.7 U12.18 U12.25 U12.26
I_SAMPLEA: D1A.1 D2A.2 F1A.2 R7A.2 U1A.4
I_SAMPLEB: D1B.1 D2B.2 F1B.2 R7B.2 U1B.4
I_SAMPLEC: D1C.1 D2C.2 F1C.2 R7C.2 U1C.4
I_SAMPLED: D1D.1 D2D.2 F1D.2 R7D.2 U1D.4
I_SELECT1: R23A.2 U1A.5
I_SELECT2: R23B.2 U1B.5
I_SELECT3: R23C.2 U1C.5
I_SELECT4: R23D.2 U1D.5
ICSP_CLCKA: ICSP1A.5 U5A.12
ICSP_CLCKB: ICSP1B.5 U5B.12
ICSP_CLCKC: ICSP1C.5 U5C.12
ICSP_CLCKD: ICSP1D.5 U5D.12
ICSP_DATAA: ICSP1A.4 R23A.1 U5A.13
ICSP_DATAB: ICSP1B.4 R23B.1 U5B.13
ICSP_DATAC: ICSP1C.4 R23C.1 U5C.13
ICSP_DATAD: ICSP1D.4 R23D.1 U5D.13
ICSP_VPPA: ICSP1A.1 U5A.4
ICSP_VPPB: ICSP1B.1 U5B.4
ICSP_VPPC: ICSP1C.1 U5C.4
ICSP_VPPD: ICSP1D.1 U5D.4
ID1_1: R30.1 U5A.3
ID1_2: R32.1 U5B.3
ID1_3: R34.1 U5C.3
ID1_4: R36.1 U5D.3
ID2_1: R31.1 U5A.2
ID2_2: R33.1 U5B.2
ID2_3: R35.1 U5C.2
ID2_4: R37.1 U5D.2
K_010A: U1A.6 U5A.10
K_010B: U1B.6 U5B.10
K_010C: U1C.6 U5C.10
K_010D: U1D.6 U5D.10
K_100A: U1A.12 U5A.9
K_100B: U1B.12 U5B.9
K_100C: U1C.12 U5C.9
K_100D: U1D.12 U5D.9
NetC4A_1: C4A.1 R1A.2 R2A.2 R3A.2 R4A.1 U2A.2
NetC4A_2: C4A.2 R4A.2 R24A.1 TP2A.1 U2A.6
NetC4B_1: C4B.1 R1B.2 R2B.2 R3B.2 R4B.1 U2B.2
NetC4B_2: C4B.2 R4B.2 R24B.1 TP2B.1 U2B.6
NetC4C_1: C4C.1 R1C.2 R2C.2 R3C.2 R4C.1 U2C.2
NetC4C_2: C4C.2 R4C.2 R24C.1 TP2C.1 U2C.6
NetC4D_1: C4D.1 R1D.2 R2D.2 R3D.2 R4D.1 U2D.2
NetC4D_2: C4D.2 R4D.2 R24D.1 TP2D.1 U2D.6
NetC24_1: C24.1 U12.28 Y2.2
NetC25_1: C25.1 U12.27 Y2.1
NetD3A_1: D3A.1 D4A.1
NetD3A_2: D3A.3 R6A.2 R8A.1
NetD3B_1: D3B.1 D4B.1
NetD3B_2: D3B.3 R6B.2 R8B.1
NetD3C_1: D3C.1 D4C.1
NetD3C_2: D3C.3 R6C.2 R8C.1
NetD3D_1: D3D.1 D4D.1
NetD3D_2: D3D.3 R6D.2 R8D.1
NetF2_1: F2.1 P3.1
NetL1_1: L1.1 P3.0
NetR2A_1: R2A.1 U1A.9
NetR2B_1: R2B.1 U1B.9
NetR2C_1: R2C.1 U1C.9
NetR2D_1: R2D.1 U1D.9
NetR3A_1: R3A.1 U1A.10
NetR3B_1: R3B.1 U1B.10
NetR3C_1: R3C.1 U1C.10
NetR3D_1: R3D.1 U1D.10
NetR5A_2: R5A.2 U2A.3
NetR5B_2: R5B.2 U2B.3
NetR5C_2: R5C.2 U2C.3
NetR5D_2: R5D.2 U2D.3
NetR8A_2: R8A.2 R9A.1
NetR8B_2: R8B.2 R9B.1
NetR8C_2: R8C.2 R9C.1
NetR8D_2: R8D.2 R9D.1
NetR20A_2: R20A.2 U6A.2
NetR20B_2: R20B.2 U6B.2
NetR20C_2: R20C.2 U6C.2
NetR20D_2: R20D.2 U6D.2
NetR22A_1: R22A.1 U7A.2
NetR22B_1: R22B.1 U7B.2
NetR22C_1: R22C.1 U7C.2
NetR22D_1: R22D.1 U7D.2
NetR25_2: R25.2 U12.16
NetR26_2: R26.2 U12.15
NetU11_2: U11.2 U11.3 U11.5 U11.9 U11.11
RX_TTLA: U5A.5 U6A.4
RX_TTLB: U5B.5 U6B.4
RX_TTLC: U5C.5 U6C.4
RX_TTLD: U5D.5 U6D.4
SAMPLEA: R5A.1 TP1A.1 U1A.2 U1A.3
SAMPLEB: R5B.1 TP1B.1 U1B.2 U1B.3
SAMPLEC: R5C.1 TP1C.1 U1C.2 U1C.3
SAMPLED: R5D.1 TP1D.1 U1D.2 U1D.3
TTL_RX: U7A.4 U7B.4 U7C.4 U7D.4 U12.5
TTL_TX: U11.1 U12.1
TTL_TX1: R20A.1 U11.4
TTL_TX2: R20B.1 U11.6
TTL_TX3: R20C.1 U11.8
TTL_TX4: R20D.1 U11.10
TX_TTLA: R22A.2 U5A.6
TX_TTLB: R22B.2 U5B.6
TX_TTLC: R22C.2 U5C.6
TX_TTLD: R22D.2 U5D.6
USB+: D11.2 P3.3 R26.1 R28.2
USB-: D10.2 P3.2 R25.1
V2.048A: R18A.1 U5A.8
V2.048B: R18B.1 U5B.8
V2.048C: R18C.1 U5C.8
V2.048D: R18D.1 U5D.8
V_GND1: C2A.1 C3A.2 D1A.2 D2A.1 D4A.3 J1A.1 R1A.1 R7A.1 R10A.2 R18A.2 U1A.8 U1A.11
V_GND2: C2B.1 C3B.2 D1B.2 D2B.1 D4B.3 J1B.1 R1B.1 R7B.1 R10B.2 R18B.2 U1B.8 U1B.11
V_GND3: C2C.1 C3C.2 D1C.2 D2C.1 D4C.3 J1C.1 R1C.1 R7C.1 R10C.2 R18C.2 U1C.8 U1C.11
V_GND4: C2D.1 C3D.2 D1D.2 D2D.1 D4D.3 J1D.1 R1D.1 R7D.1 R10D.2 R18D.2 U1D.8 U1D.11
V_SELECT1: U1A.13 U5A.7
V_SELECT2: U1B.13 U5B.7
V_SELECT3: U1C.13 U5C.7
V_SELECT4: U1D.13 U5D.7
VCC: C10A.1 C10B.1 C10C.1 C10D.1 C21.2 C22.1 F2.2 PSU1A.2 PSU1B.2 PSU1C.2 PSU1D.2 U6A.1 U6B.1 U6C.1 U6D.1 U7A.6 U7B.6 U7C.6 U7D.6 U11.14 U12.20
VNEG1: C1A.1 C3A.1 C5A.2 C15A.1 ICSP1A.3 PSU1A.3 R30.2 R31.2 TP3A.1 U1A.7 U2A.4 U5A.14 U6A.5
VNEG2: C1B.1 C3B.1 C5B.2 C15B.1 ICSP1B.3 PSU1B.3 R32.2 TP3B.1 U1B.7 U2B.4 U5B.14 U6B.5
VNEG3: C1C.1 C3C.1 C5C.2 C15C.1 ICSP1C.3 PSU1C.3 R35.2 TP3C.1 U1C.7 U2C.4 U5C.14 U6C.5
VNEG4: C1D.1 C3D.1 C5D.2 C15D.1 ICSP1D.3 PSU1D.3 TP3D.1 U1D.7 U2D.4 U5D.14 U6D.5
VOLTS_IN_1A: J1A.2 R6A.1
VOLTS_IN_1B: J1B.2 R6B.1
VOLTS_IN_1C: J1C.2 R6C.1
VOLTS_IN_1D: J1D.2 R6D.1
VPOS1: C1A.2 C2A.2 C5A.1 C15A.2 ICSP1A.2 PSU1A.4 U1A.14 U2A.1 U2A.7 U5A.1 U6A.6 U7A.1
VPOS2: C1B.2 C2B.2 C5B.1 C15B.2 ICSP1B.2 PSU1B.4 R33.2 U1B.14 U2B.1 U2B.7 U5B.1 U6B.6 U7B.1
VPOS3: C1C.2 C2C.2 C5C.1 C15C.2 ICSP1C.2 PSU1C.4 R34.2 U1C.14 U2C.1 U2C.7 U5C.1 U6C.6 U7C.1
VPOS4: C1D.2 C2D.2 C5D.1 C15D.2 ICSP1D.2 PSU1D.4 R36.2 R37.2 U1D.14 U2D.1 U2D.7 U5D.1 U6D.6 U7D.1
VTAPA: R9A.2 R10A.1 U1A.1
VTAPB: R9B.2 R10B.1 U1B.1
VTAPC: R9C.2 R10C.1 U1C.1
VTAPD: R9D.2 R10D.1 U1D.1
pads on no net: D3A.2 D3B.2 D3C.2 D3D.2 D4A.2 D4B.2 D4C.2 D4D.2 ICSP1A.6 ICSP1A.A ICSP1A.B ICSP1A.C ICSP1B.6 ICSP1B.A ICSP1B.B ICSP1B.C ICSP1C.6 ICSP1C.A ICSP1C.B ICSP1C.C ICSP1D.6 ICSP1D.A ICSP1D.B ICSP1D.C J1A.0 J1A.3 J1A.4 J1B.0 J1B.3 J1B.4 J1C.0 J1C.3 J1C.4 J1D.0 J1D.3 J1D.4 P3.4 P3.MT U2A.5 U2A.8 U2B.5 U2B.8 U2C.5 U2C.8 U2D.5 U2D.8 U6A.3 U6B.3 U6C.3 U6D.3 U7A.3 U7B.3 U7C.3 U7D.3 U11.12 U12.2 U12.3 U12.6 U12.8 U12.9 U12.10 U12.11 U12.12 U12.13 U12.14 U12.21 U12.22 U12.23 U12.24

## Polygon pours and split planes (outlines as drawn)
GND on Top Layer "Bottom Layer-No Net" (solid, remove dead copper, shelved, pour order 36): 28.981,31.369 28.981,-31.4 55,-31.4 55,31.4 28.981,31.4
VNEG1 on Top Layer "Bottom Layer-No Net" (solid, remove dead copper, shelved, pour order 31): -13.462,16.51 -13.462,31.021 6.985,31.021 6.985,16.51 -13.462,16.51
VNEG2 on Top Layer "Bottom Layer-No Net" (solid, remove dead copper, shelved, pour order 32): -13.462,0.381 -13.462,16.002 6.985,16.002 6.985,0.381 -13.462,0.381
VNEG3 on Top Layer "Bottom Layer-No Net" (solid, remove dead copper, shelved, pour order 33): -13.462,-16.129 -13.462,-0.508 6.985,-0.508 6.985,-16.129 -13.462,-16.129
VNEG4 on Top Layer "Bottom Layer-No Net" (solid, remove dead copper, shelved, pour order 34): -13.462,-32.639 -13.462,-17.018 6.985,-17.018 6.985,-32.639 -13.462,-32.639
V_GND3 on Top Layer "Bottom Layer-No Net" (solid, remove dead copper, shelved, pour order 23): -54.483,-0.508 -13.97,-0.508 -13.97,-16.129 -54.483,-16.129 -54.483,-0.508
V_GND2 on Top Layer "Bottom Layer-No Net" (solid, remove dead copper, shelved, pour order 24): -54.483,16.002 -13.97,16.002 -13.97,0.381 -54.483,0.381 -54.483,16.002
V_GND1 on Top Layer "Bottom Layer-No Net" (solid, remove dead copper, shelved, pour order 25): -54.483,32.512 -13.97,32.512 -13.97,16.891 -54.483,16.891 -54.483,32.512
V_GND4 on Top Layer "Bottom Layer-No Net" (solid, remove dead copper, shelved, pour order 26): -54.483,-17.018 -13.97,-17.018 -13.97,-32.639 -54.483,-32.639 -54.483,-17.018
GND on Bottom Layer "Bottom Layer-No Net" (solid, remove dead copper, shelved, pour order 35): 28.981,31.369 28.981,-31.4 55,-31.4 55,31.4 28.981,31.4
V_GND4 on Bottom Layer "Bottom Layer-No Net" (solid, remove dead copper, shelved, pour order 19): -54.483,-17.018 -13.97,-17.018 -13.97,-32.639 -54.483,-32.639 -54.483,-17.018
V_GND1 on Bottom Layer "Bottom Layer-No Net" (solid, remove dead copper, shelved, pour order 20): -54.483,32.512 -13.97,32.512 -13.97,16.891 -54.483,16.891 -54.483,32.512
V_GND2 on Bottom Layer "Bottom Layer-No Net" (solid, remove dead copper, shelved, pour order 21): -54.483,16.002 -13.97,16.002 -13.97,0.381 -54.483,0.381 -54.483,16.002
V_GND3 on Bottom Layer "Bottom Layer-No Net" (solid, remove dead copper, shelved, pour order 22): -54.483,-0.508 -13.97,-0.508 -13.97,-16.129 -54.483,-16.129 -54.483,-0.508
VNEG4 on Bottom Layer "Bottom Layer-No Net" (solid, remove dead copper, shelved, pour order 27): -13.462,-32.639 -13.462,-17.018 6.985,-17.018 6.985,-32.639 -13.462,-32.639
VNEG3 on Bottom Layer "Bottom Layer-No Net" (solid, remove dead copper, shelved, pour order 28): -13.462,-16.129 -13.462,-0.508 6.985,-0.508 6.985,-16.129 -13.462,-16.129
VNEG2 on Bottom Layer "Bottom Layer-No Net" (solid, remove dead copper, shelved, pour order 29): -13.462,0.381 -13.462,16.002 6.985,16.002 6.985,0.381 -13.462,0.381
VNEG1 on Bottom Layer "Bottom Layer-No Net" (solid, remove dead copper, shelved, pour order 30): -13.462,16.51 -13.462,31.021 6.985,31.021 6.985,16.51 -13.462,16.51

## Keep-outs
Keep-Out Layer:
  lines w0.254: -53.213,31.4 -53.594,31.4 ; -53.594,31.4 55,31.4 55,-31.4 ; -53.594,31.4 -53.594,-31.4 -53.563,-31.4 55,-31.4 ; 55,-31.4 55,-31.4

## Silkscreen, mask and mechanical layers (free items; w line width, h text height)
Bottom Overlay:
  drawing of 39 lines, arcs and shapes, not listed
  text "NASCO MULTICHANNEL METER" at 24.359,30.455 h2.54 r90
  text "V2.00  DATE TBA" at 27.051,30.353 h2.54 r90
  text "http://ludzinc.blogspot.com.au" at 50.106,26.917 h4.57 r90
  text "⋮" at -10.465,24.994 h50.8 r90
  text "NASCO" at 37.968,4.538 h4.57 r90
Mechanical 1:
  lines w0.254: -55,30.988 -54.991,30.988 ; -54.991,30.988 -54.991,33.528 54.991,33.528 54.991,-33.528 -55,-33.528 -55,-30.988 -53.594,-30.988 -53.594,30.988 -54.991,30.988
Mechanical 2:
  lines w0.254: -53.594,-5.461 -53.594,29.21 -53.594,30.988 -55,30.988 -55,33.5 ; -53.594,5.461 -53.594,-29.21 -53.594,-30.988 -55,-30.988 ; -50.165,-24.765 47.5,-24.765 ; -50.165,-8.255 47.5,-8.255 ; -50.165,8.255 47.5,8.255 ; -50.165,24.765 47.5,24.765 ; 25,-33.5 25,0 25,33.5 ; 50.8,-2.2 50.8,2.2 ; -55,-33.5 -55,-30.988 ; -55,-33.5 55,-33.5 ; -55,-33.5 -55,-33.5 ; -55,-33.5 -55,-33.5 ; -55,-30.988 -55,-30.988 ; -55,33.5 -55,33.5 ; -55,33.5 55,33.5 55,-33.5 ; 25,33.5 25,33.5 ; 55,-33.5 55,-33.5 ; 55,-33.5 55,-33.5 ; -0.094,32.009 -0.094,32.009